# Altium PCB PCB3.PcbDoc
Units mm, origin at the board's own origin, x right, y up, seen from the top; angles counter-clockwise.
Board outline 50 x 50 mm, 2 copper layers (Top Layer, Bottom Layer); 20 components, 12 nets, 59 pads, 0 vias.
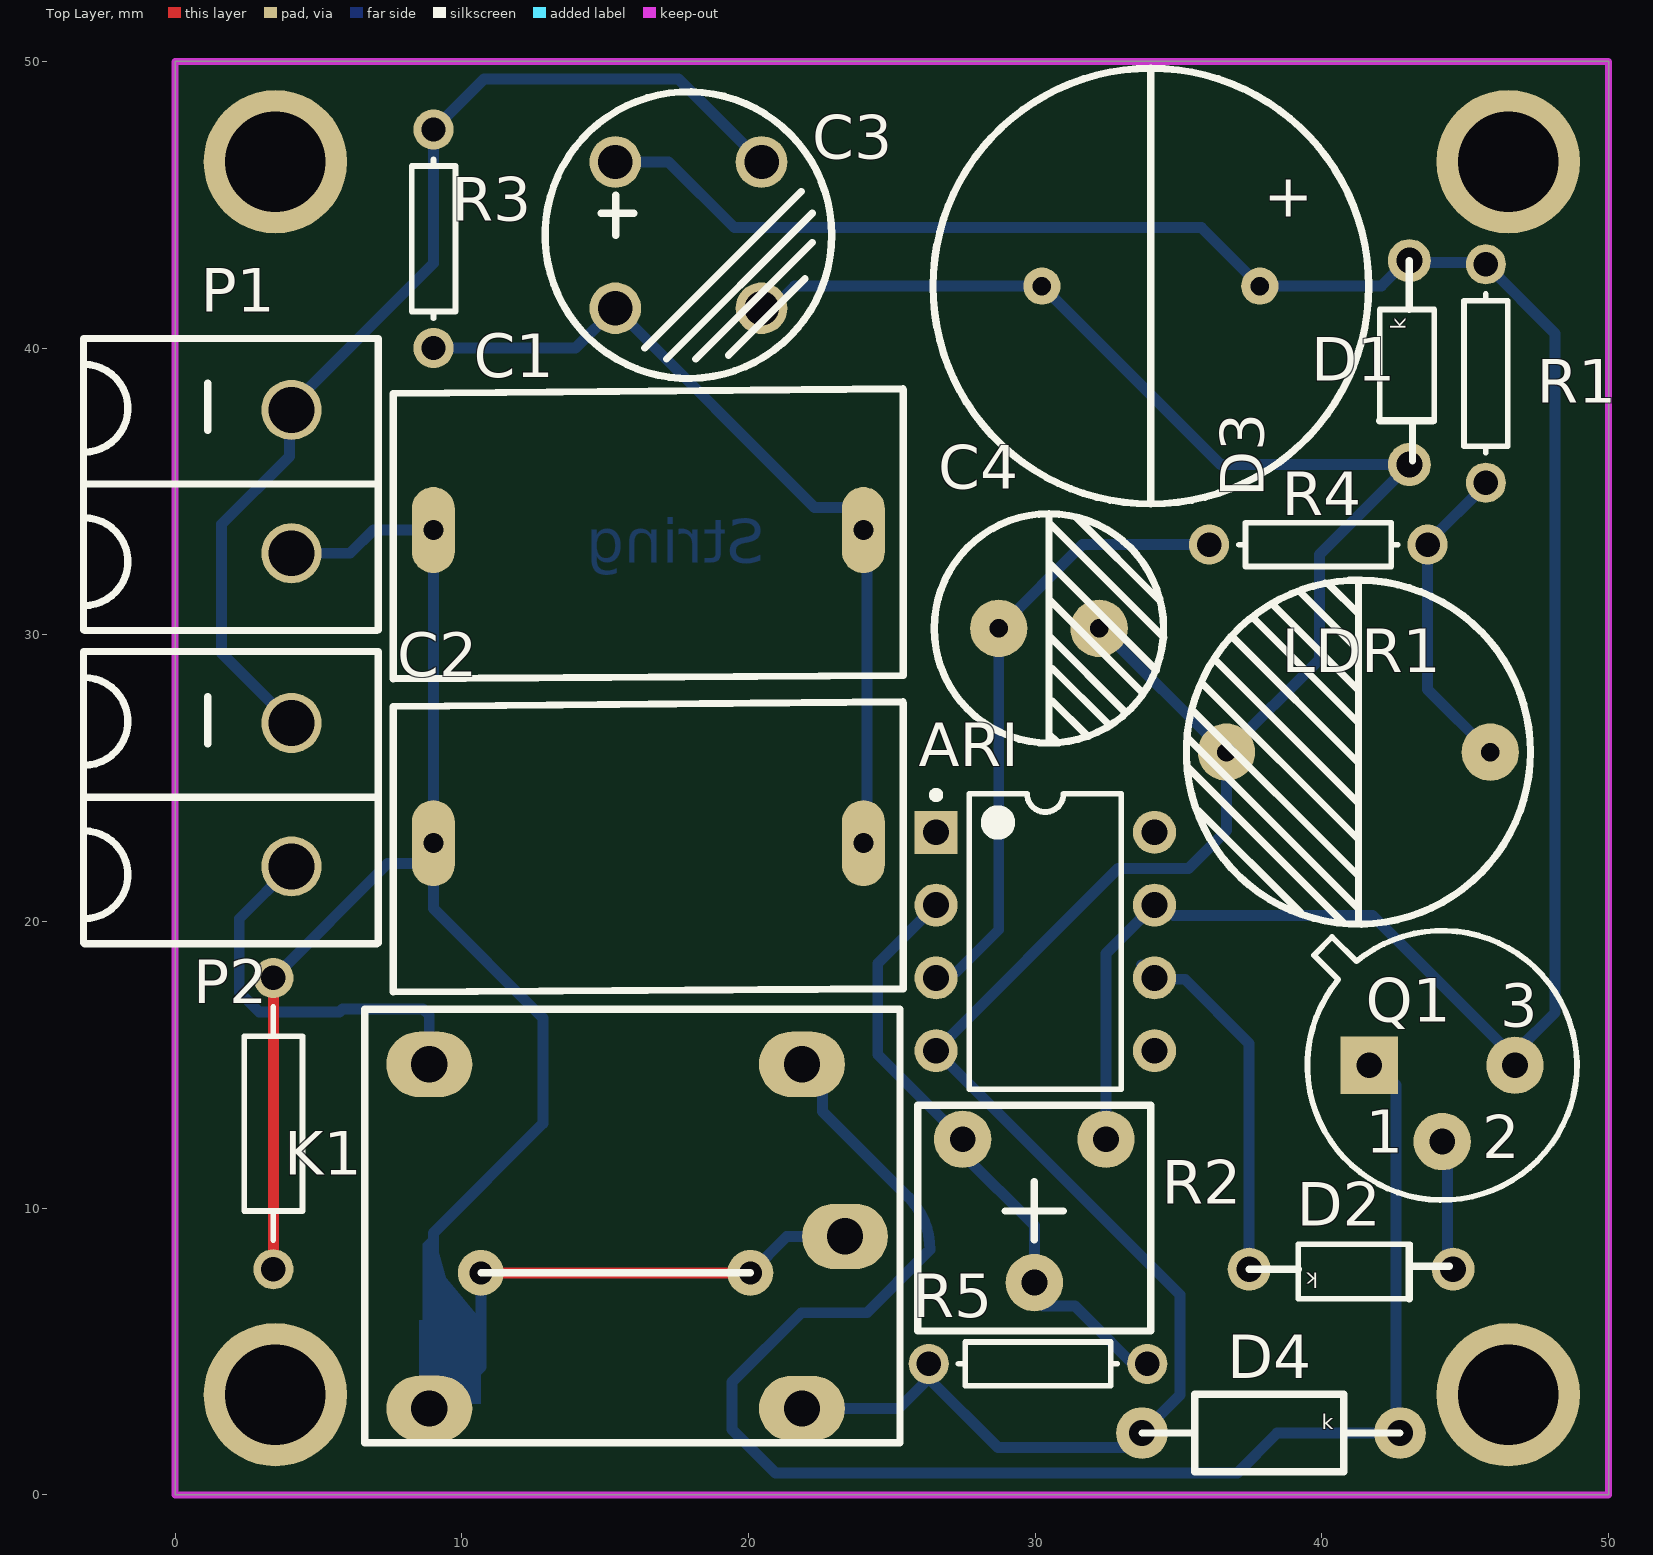
[diagram p0: Top Layer view]
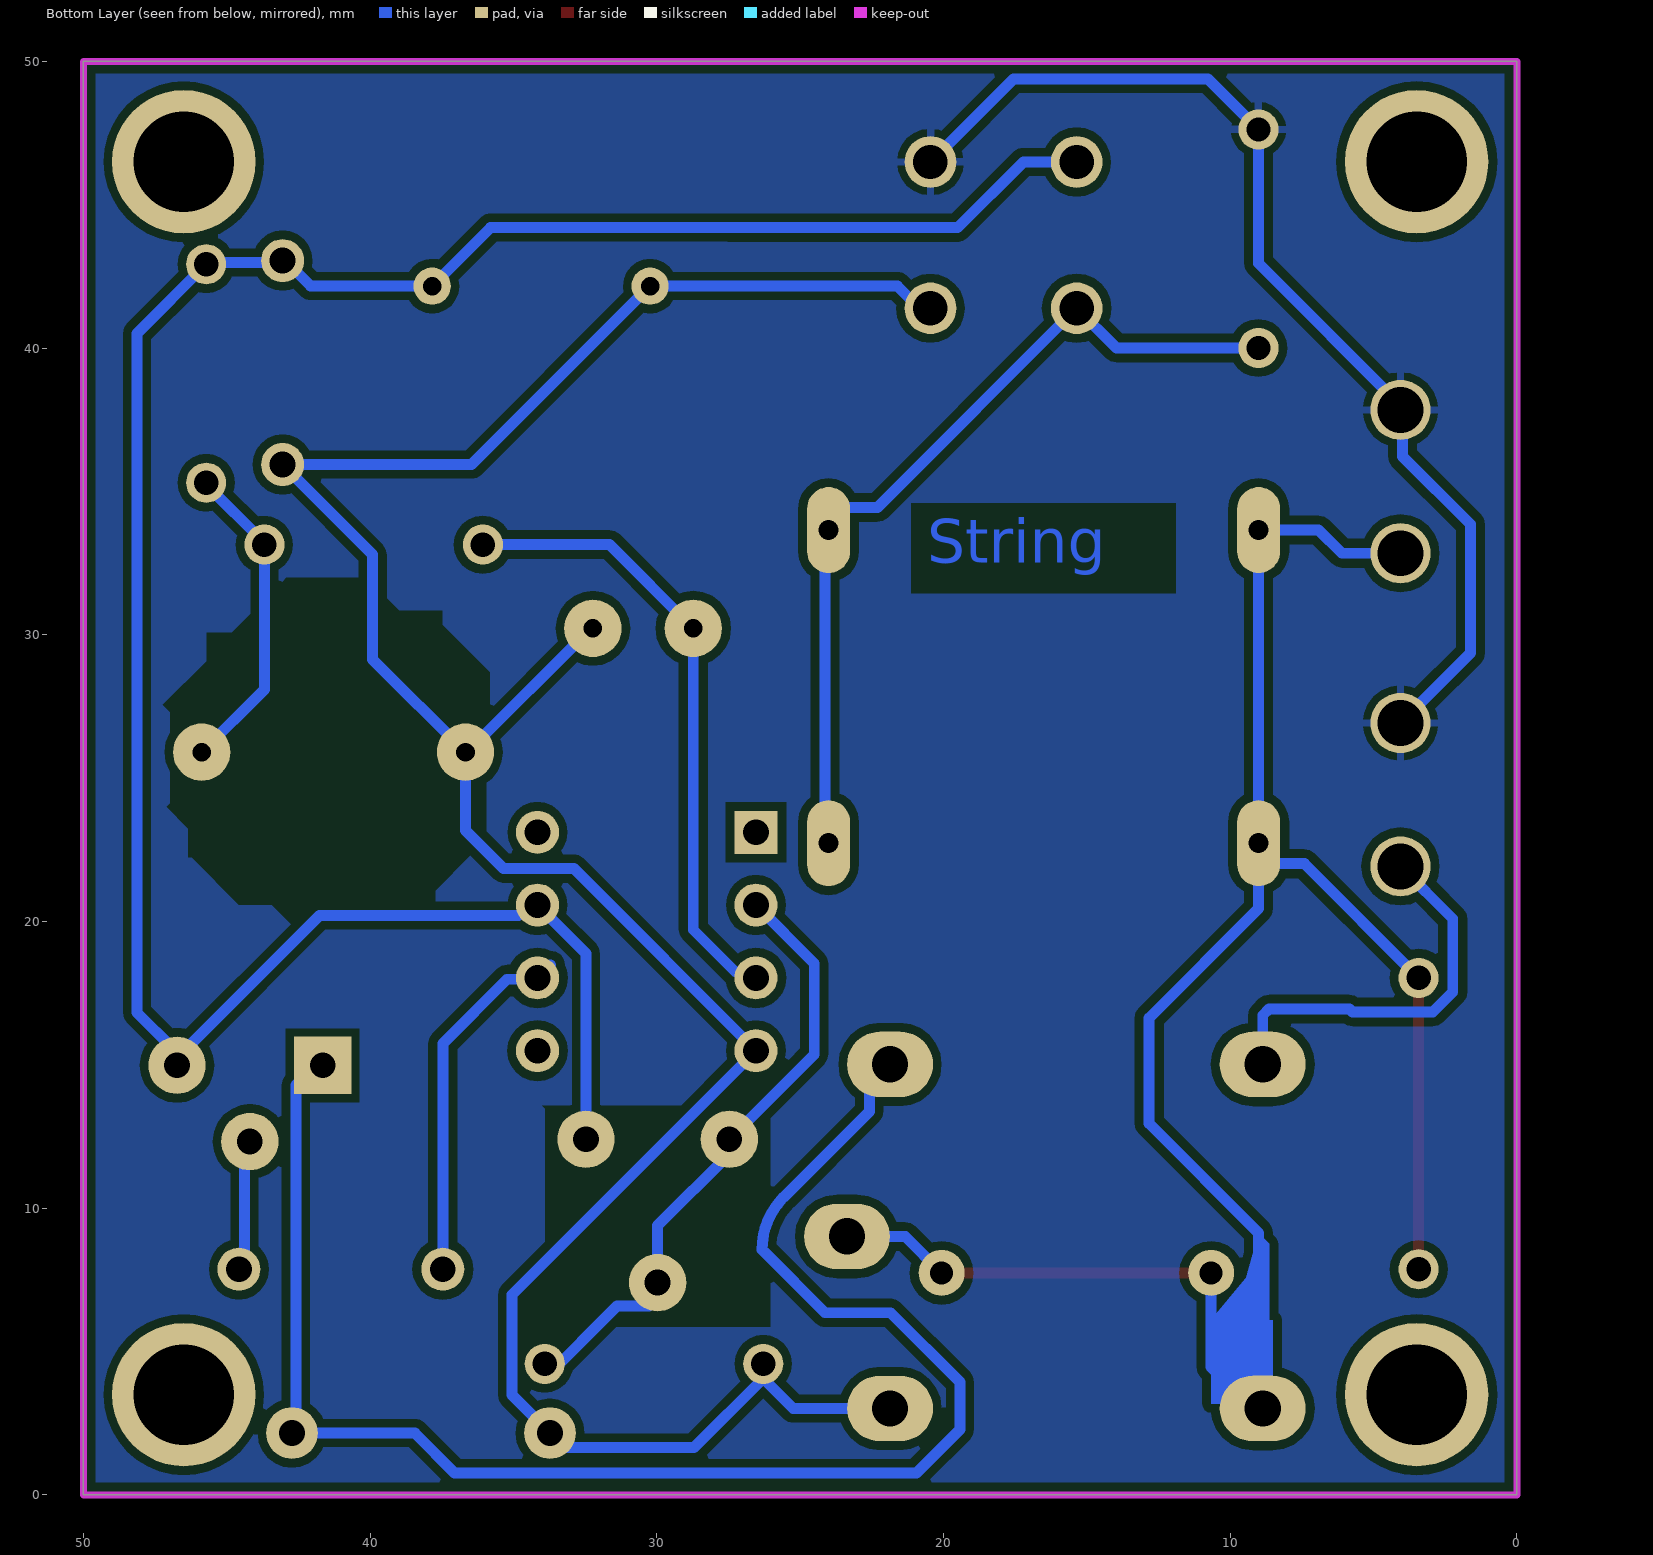
[diagram p1: Bottom Layer view, seen from below]

## Layer stack, top to bottom
Top Solder: solder mask 0.0102, Solder Resist, Dk 3.5
Top Layer: signal copper 0.0356
Dielectric 1: dielectric 0.32, FR-4, Dk 4.8
Bottom Layer: signal copper 0.0356
Bottom Solder: solder mask 0.0102, Solder Resist, Dk 3.5

## Board outline
0,0 50,0 50,50 0,50

## Design rules (kind name [scope] priority, off if disabled: settings)
Clearance [All] p1: gap=0.3 ignorepadtopadclearanceinfootprint=FALSE
ComponentClearance [All] p1: gap=0.025 collisioncheckmode=3 verticalgap=0.025 showdistances=FALSE
PolygonConnect [All] p1: connectstyle=Relief reliefconductorwidth=0.254 reliefentries=4 polygonreliefangle="90 Angle" airgapwidth=0.254
RoutingVias [All] p1: holewidth=0.711 width=1.27 viastyle="Through Hole" minholewidth=0.711 minwidth=1.27 maxholewidth=0.711 maxwidth=1.27
SilkToSilkClearance [All] p1: silktosilkclearance=0
SilkToSolderMaskClearance [IsPad] p1: minsilkscreentomaskgap=0 clearancetoexposedcopper=TRUE
SolderMaskExpansion [All] p1: expansion=0.102 istentingtop=FALSE
Width [All] p1: maxlimit=0.381 minlimit=0.381 preferedwidth=0.381 minimp=50.000000 maximp=50.000000 favimp=50.000000
27 further rules are at their usual default settings.

## Components (designator, comment, footprint, x,y, rotation, side; value= is the part's Value field where it differs from the comment)
ARI "UA741AD" UA741CP 30.353,19.304 r90 top
C1 "330nF" 220NFCAP_330NFCAP 16.51,33.655 r0 top
C2 "220nF" 220NFCAP_330NFCAP 16.51,22.733 r0 top
C3 "220uF" CAP220UF_ELECTEROLYTIC 34.036,42.164 r180 top value=330uF
C4 "100uF" CAP100UF_ELECTROLYTIC 30.48,30.226 r0 top
D1 "Bridge1" DIODE_BRIDGE 17.907,43.942 r90 top
D2 "3.3V" ZENER_DIODE 41.021,7.874 r180 top
D3 "24V" ZENER_DIODE 43.053,39.497 r90 top
D4 "Diode" DIODE 38.227,2.159 r0 top
K1 "Relay 24V" RELAY 15.367,9.017 r0 top
LDR1 "" LDR 41.275,25.908 r180 top
P1 "Header 2" CONNECTOR 4.064,35.346 r90 top
P2 "Header 2" CONNECTOR 4.064,24.424 r90 top
Q1 "BC140-10" BIPOLAR_TRANSISTORS 44.196,13.656 r180 top
R1 "8.2K" RES_FILMCARBON 45.72,39.116 r270 top
R2 "5K" POTENTIOMETER 29.972,9.906 r180 top
R3 "820" RES_FILMCARBON 9.017,43.815 r90 top
R4 "33K" RES_FILMCARBON 39.878,33.147 r0 top
R5 "2.2K" RES_FILMCARBON 30.099,4.572 r180 top
? "Comment" AXIAL-0.4 3.429,12.954 r90 top

## Footprints (in the part's own frame and the unit in brackets; to place one, negate y for a bottom-side part, rotate by r counter-clockwise, add the part's x,y. Pads: shape width x height; smd on the part's side, far side on the other; paste and mask are expansions set on the pad)
220NFCAP_330NFCAP [mm]
  oval 1.5x3 hole 0.7: 1(-7.5,0) 2(7.5,0)
  silkscreen extent -8.9,-5.19 8.88,4.93
AXIAL-0.4 [mm] "Axial Device, Thru-Hole; 2 Leads; 0.4 in Pin Spacing"
  round 1.4 hole 0.85: 1(-5.08,0) 2(5.08,0)
  silkscreen extent -4.06,-1.02 4.06,1.02
BIPOLAR_TRANSISTORS [mm]
  rect 2x2 hole 0.9: 1(2.54,-1.33)
  round 2 hole 0.9: 2(0,1.33) 3(-2.54,-1.33)
  silkscreen extent -4.7,-6.03 4.7,3.37
CAP100UF_ELECTROLYTIC [mm]
  round 2 hole 0.65: 1(-1.75,0) 2(1.75,0)
  silkscreen extent -4,-4 4,4
CAP220UF_ELECTEROLYTIC [mm]
  round 1.3 hole 0.65: 1(-3.8,0) 2(3.8,0)
  silkscreen extent -7.6,-7.6 7.6,7.6
CONNECTOR [mm]
  round 2.1 hole 1.6: 1(-2.5,0) 2(2.5,0)
  silkscreen extent -5.2,-3.03 4.99,7.26
DIODE [mm]
  round 1.8 hole 0.9: 1(-4.5,0) 2(4.5,0)
  silkscreen extent -4.5,-1.35 4.5,1.35
DIODE_BRIDGE [mm]
  round 1.8 hole 1.2: 1(2.55,2.55) 2(2.55,-2.55) 3(-2.55,-2.55) 4(-2.55,2.55)
  silkscreen extent -5,-5 5,5
LDR [mm]
  round 2 hole 0.65: 1(-4.6,0) 2(4.6,0)
  silkscreen extent -6,-6 6,6, body extent -6,-5.32 6,5.59, height 2.7
POTENTIOMETER [mm]
  round 2 hole 0.9: 1(-2.5,-2.5) 2(2.5,-2.5) 3(0,2.5)
  silkscreen extent -4.06,-3.68 4.06,4.19
RELAY [mm]
  oval 3x2.28 hole 1.27: 1(8,0) 5(6.5,-6)
  oval 3x2.286 hole 1.27: 2(-6.5,-6) 3(-6.5,6) 4(6.5,6)
  silkscreen extent -8.75,-7.19 9.92,7.92
RES_FILMCARBON [mm]
  round 1.4 hole 0.85: 1(3.81,0) 2(-3.81,0)
  silkscreen extent -2.77,-0.76 2.77,0.76
UA741CP [mm]
  rect 1.5x1.5 hole 0.9: 1(3.81,3.81)
  round 1.5 hole 0.9: 2(1.27,3.81) 3(-1.27,3.81) 4(-3.81,3.81) 5(-3.81,-3.81) 6(-1.27,-3.81) 7(1.27,-3.81) 8(3.81,-3.81)
  silkscreen extent -5.15,-2.65 5.23,3.93, body extent -5.15,-3.6 5.15,3.6, height 5.34
ZENER_DIODE [mm]
  round 1.5 hole 0.9: 1(-3.556,0) 2(3.556,0)
  silkscreen extent -3.43,-0.87 3.56,1.03

## Part data
ARI: "General-Purpose Single Operational Amplifier", Code_IPC=SOIC127P600-8, Code_JEDEC=MS-012-AA, ComponentLink1Description="Manufacturer Link", ComponentLink1URL=http://www.st.com/, ComponentLink2Description=Datasheet, ComponentLink2URL=http://www.st.com/stonline/products/literature/ds/5304/ua741.pdf, DatasheetVersion=Oct-1997, LatestRevisionDate=13-Apr-2006, LatestRevisionNote="IPC-7351 Footprint Added.", PackageDescription="8-Pin Small Outline Integrated Circuit 1.27 mm Pitch", PackageReference=SO8, PackageVersion=Dec-2002, Published=24-Aug-2001, Publisher="Altium Limited"
C1 C2: library part Cap, "Capacitor", LatestRevisionDate=17-Jul-2002, LatestRevisionNote="Re-released for DXP Platform.", PackageDescription="Radial Cap, Thru-Hole; 2 Leads; 0.3 in Pin Spacing", PackageReference=RAD-0.3, Published=8-Jun-2000, Publisher="Altium Limited"
C3 C4: library part Cap2, "Capacitor", PackageDescription="Capacitor; 2 Leads", PackageReference=CAPR5-4X5, Published=23-Sep-2002, Publisher="Altium Limited"
D1: "Full Wave Diode Bridge", DatasheetVersion=E2732B, LatestRevisionDate=29-May-2009, LatestRevisionNote="Sch pins A & K swapped.", PackageDescription="Bridge Rectifier; 4 Terminals; Body 9.4 x 9.4 mm (typ); Pitch 5.08 mm", PackageReference=D-38, Published=8-Jun-2000, Publisher="Altium Limited"
D2 D3: library part "D Zener", "Zener Diode", LatestRevisionDate=17-Jul-2002, LatestRevisionNote="Re-released for DXP Platform.", PackageDescription="Diode, Thru-Hole; 2 Leads; 0.7 in Pin Spacing", PackageReference=DIODE-0.7, Published=8-Jun-2000, Publisher="Altium Limited"
D4: "Default Diode", Code_JEDEC=DO-214-AB, LatestRevisionDate=17-Jul-2002, LatestRevisionNote="Re-released for DXP Platform.", PackageDescription="DO-214-AB/SMC; 2 C-Bend Leads; Body 7.9 x 5.9 mm, inc. leads (LxW)", PackageReference=SMC, PackageVersion=Sep-1996, Published=8-Jun-2000, Publisher="Altium Limited"
K1: library part Relay, "SPDT Relay", LatestRevisionDate=17-Jul-2002, LatestRevisionNote="Re-released for DXP Platform.", PackageReference=MODULE5B, Published=8-Jun-2000, Publisher="Altium Limited"
LDR1: library part LDR
P1 P2: "Header, 2-Pin", LatestRevisionDate=17-Jul-2002, LatestRevisionNote="Re-released for DXP Platform.", Publisher="Altium Limited"
Q1: "Amplifier Transistor NPN Silicon", ComponentLink1Description="Manufacturer Link", ComponentLink1URL=http://www.onsemi.com/site/products/landing?taxonomyID=194, DatasheetVersion=1991, LatestRevisionDate=17-Jul-2002, LatestRevisionNote="Re-released for DXP Platform.", PackageDescription="Can; 3 Leads; Pin Circle Dia. 5.08 mm; Lead Dia. 0.48 mm (max)", PackageReference=79-04, PackageVersion=1997, Published=29-Sep-2000, Publisher="Altium Limited"
R1 R3 R4 R5: library part Res1, "Resistor", LatestRevisionDate=17-Jul-2002, LatestRevisionNote="Re-released for DXP Platform.", PackageDescription="Axial Device, Thru-Hole; 2 Leads; 0.3 in Pin Spacing", PackageReference=AXIAL-0.3, Published=8-Jun-2000, Publisher="Altium Limited"
R2: library part RPot, "Potentiometer", LatestRevisionDate=17-Jul-2002, LatestRevisionNote="Re-released for DXP Platform.", PackageDescription="Variable Resistor, Thru-Hole; 3 Leads", PackageReference=VR5, Published=8-Jun-2000, Publisher="Altium Limited", Set Position=0.5, Sim Note="Enter the Resistance value and the set point into parameter fields."

## Free pads (board coordinates)
  round 5 hole 3.5: 1(3.5,3.5) 2(46.5,3.5) 3(46.5,46.5) 4(3.5,46.5)
  round 1.6 hole 0.8: 5(20.066,7.747) 6(10.668,7.747)

## Nets (pads, with @x,y where several pads share a name; then routed paths per layer and width w, separated by ;. In a path a pad name is that pad's centre, name@x,y a point inside that pad or via, vN(x,y) a via of type N, cw(c..) or ccw(c..) an arc to the next point about the centre after c; other vN are vias at no path point)
NetARI_2: ARI.2 R2.2 R2.3 R5.2 | length 21.4
  Bottom Layer w0.381: ARI.2 24.511,18.542 24.511,15.367 R2.2 ; R2.2@27.472,11.898 29.972,9.398 29.972,6.898 30.282,6.588 31.385,6.588 R5.2@33.909,4.064
NetARI_3: ARI.3 C4.1 R4.2 | length 22.1
  Bottom Layer w0.381: ARI.3@26.67,17.653 26.67,17.858 27.06,18.248 27.265,18.248 28.73,19.713 C4.1 31.651,33.147 R4.2
NetARI_4: ARI.4 C3.2 C4.2 D1.3 D3.1 D4.1 K1.5 LDR1.2 R5.1 | length 91.2
  Bottom Layer w0.381: D1.3 20.841,41.392 21.613,42.164 C3.2 36.459,35.941 D3.1 39.912,32.8 39.912,29.145 LDR1.2 ; K1.5 25.242,3.017 26.289,4.064 28.702,1.651 D4.1@33.727,1.651 ; C4.2 32.293,30.226 36.611,25.908 LDR1.2 ; D4.1 35.054,3.486 35.054,6.984 ARI.4 32.893,21.844 35.344,21.844 36.675,23.175 LDR1.2
NetARI_6: ARI.6 D2.2 | length 12.8
  Bottom Layer w0.381: ARI.6@33.712,18.485 ARI.6 34.208,17.989 35.224,17.989 37.465,15.748 D2.2
NetARI_7: ARI.7 C3.1 D1.1 D3.2 Q1.3 R1.2 R2.1 | length 85.8
  Bottom Layer w0.381: D1.1 17.218,46.492 19.508,44.202 27.526,44.202 27.529,44.205 35.795,44.205 C3.1 42.073,42.164 42.962,43.053 D3.2 43.116,42.989 45.657,42.989 R1.2 48.133,40.513 48.133,16.821 46.863,15.551 46.863,15.113 41.77,20.206 34.834,20.206 34.68,20.36 34.194,20.36 ARI.7@34.04,20.206 ; R2.1 32.472,18.883 33.918,20.329 34.072,20.483 ARI.7
NetC1_1: ?.1 ?.2 C1.1 C2.1 K1.1 K1.2 P1.1 pad.5 pad.6 | length 75.5
  Top Layer w0.381: ?.1 ?.2 ; pad.6 pad.5
  Bottom Layer w0.381: ?.2 7.413,22.018 8.493,22.018 C2.1@9.01,22.535 ; P1.1 6.107,32.846 6.916,33.655 C1.1 C2.1 C2.1@9.01,22.535 ; K1.2 9.224,3.017 10.668,4.461 pad.6 ; K1.2@9.01,3.16 9.01,9.137 12.827,12.954 12.827,16.637 9.01,20.454 C2.1@9.01,22.535 ; pad.5 21.336,9.017 K1.1
NetC1_2: C1.2 C2.2 D1.4 R3.2 | length 30
  Bottom Layer w0.381: R3.2 13.97,40.005 D1.4 22.305,34.444 23.493,34.444 24.01,33.928 C1.2 24.13,33.535 24.13,22.853 C2.2
NetD1_2: D1.2 P1.2 P2.2 R3.1 | length 38.1
  Bottom Layer w0.381: P2.2 1.623,29.365 1.623,33.857 3.991,36.224 3.991,37.936 9.017,42.961 R3.1 10.774,49.382 17.567,49.382 D1.2
NetD2_1: D2.1 Q1.2 | length 4.6
  Bottom Layer w0.381: Q1.2 44.386,12.136 44.386,8.064 D2.1
NetD4_2: D4.2 K1.4 Q1.1 | length 56.8
  Bottom Layer w0.381: K1.4@21.51,15.017 K1.4 22.589,14.295 22.589,13.375 25.569,10.395 25.571,10.393 cw(c23.729,8.553) 26.333,8.553 26.216,8.436 24.135,6.355 21.849,6.355 19.431,3.937 19.431,2.286 20.949,0.768 37.052,0.768 38.442,2.159 D4.2@42.593,2.159 ; Q1.1@41.783,15.113 42.593,14.303 D4.2@42.593,2.159 ; D4.2 D4.2@42.593,2.159
NetK1_3: K1.3 P2.1 | length 13.9
  Bottom Layer w0.381: P2.1 2.238,20.098 2.238,17.541 2.936,16.843 5.734,16.843 5.845,16.955 8.644,16.955 8.867,16.732 K1.3
NetLDR1_1: LDR1.1 R1.1 R4.1 | length 11.1
  Bottom Layer w0.381: R1.1 45.72,35.242 43.688,33.21 R4.1 43.688,28.095 LDR1.1
pads on no net: ARI.1 ARI.5 ARI.8

## Polygon pours and split planes (outlines as drawn)
NetARI_2 on Multi-Layer (solid): 0,0 50,0 50,50 0,50
NetD1_2 on Bottom Layer "NETD1_2_L02_P004" (solid, pour order 4): 0.254,0.127 50.038,0.127 50.165,0.254 50,0.419 50,50 0,50

## Keep-outs
Keep-Out Layer:
  the board outline again, w0.254

## Other copper
Bottom Layer:
  rectangle net NetC1_1: 8.509,3.175 10.668,6.104
  region net NetC1_1: 9.01,9.137 8.636,8.763 8.636,5.08 9.652,5.08 10.033,5.461
  region net NetC1_1: 9.652,6.604 9.398,6.35 9.398,5.588 8.763,6.223
  region net NetC1_1: 9.144,5.715 9.203,5.774 9.203,5.266 9.398,5.461 9.398,5.08 10.668,3.81
  region net NetC1_1: 10.668,6.104 9.39,6.104 9.017,6.477 9.017,8.128 8.89,8.255
  text "String" at 20.574,32.512 h1.52
Multi-Layer:
  pour cut-out: 34.036,13.589 26.035,13.589 26.035,5.842 33.909,5.842 33.909,13.462
  pour cut-out: 46.99,27.305 47.244,27.559 45.72,29.083 45.72,30.099 44.831,30.099 42.926,32.004 40.132,32.004 38.989,30.861 37.465,30.861 37.465,30.353 35.814,28.702 35.814,27.178 35.433,26.797 35.941,26.289 35.941,22.86 37.719,21.082 37.719,20.701 38.481,20.701 39.37,19.812 42.418,19.812 42.545,19.685 43.434,20.574 44.577,20.574 46.228,22.225 46.355,22.225 46.355,23.241 47.117,24.003 46.99,24.13

## Silkscreen, mask and mechanical layers (free items; w line width, h text height)
Top Overlay:
  lines w0.254: 10.668,7.747 20.066,7.747
Bottom Solder:
  lines w0.254: 9.24,3.017 10.668,4.445 10.668,7.747
  text "String" at 20.574,32.512 h1.52

## Text inside footprints (layer, text, board x,y; h text height)
C3: Top Overlay "+" at 37.973,44.577 h1.5
D2: Top Overlay "k" at 39.878,7.747 h0.52 r180
D3: Top Overlay "k" at 42.926,40.64 h0.52 r90
D4: Top Overlay "k" at 40.005,2.286 h0.52
Q1: Top Overlay "3" at 46.228,16.323 h1.5; Top Overlay "2" at 45.593,11.751 h1.5; Top Overlay "1" at 41.529,11.938 h1.5